# Allegro board fmc_tlu_v1_01.brd
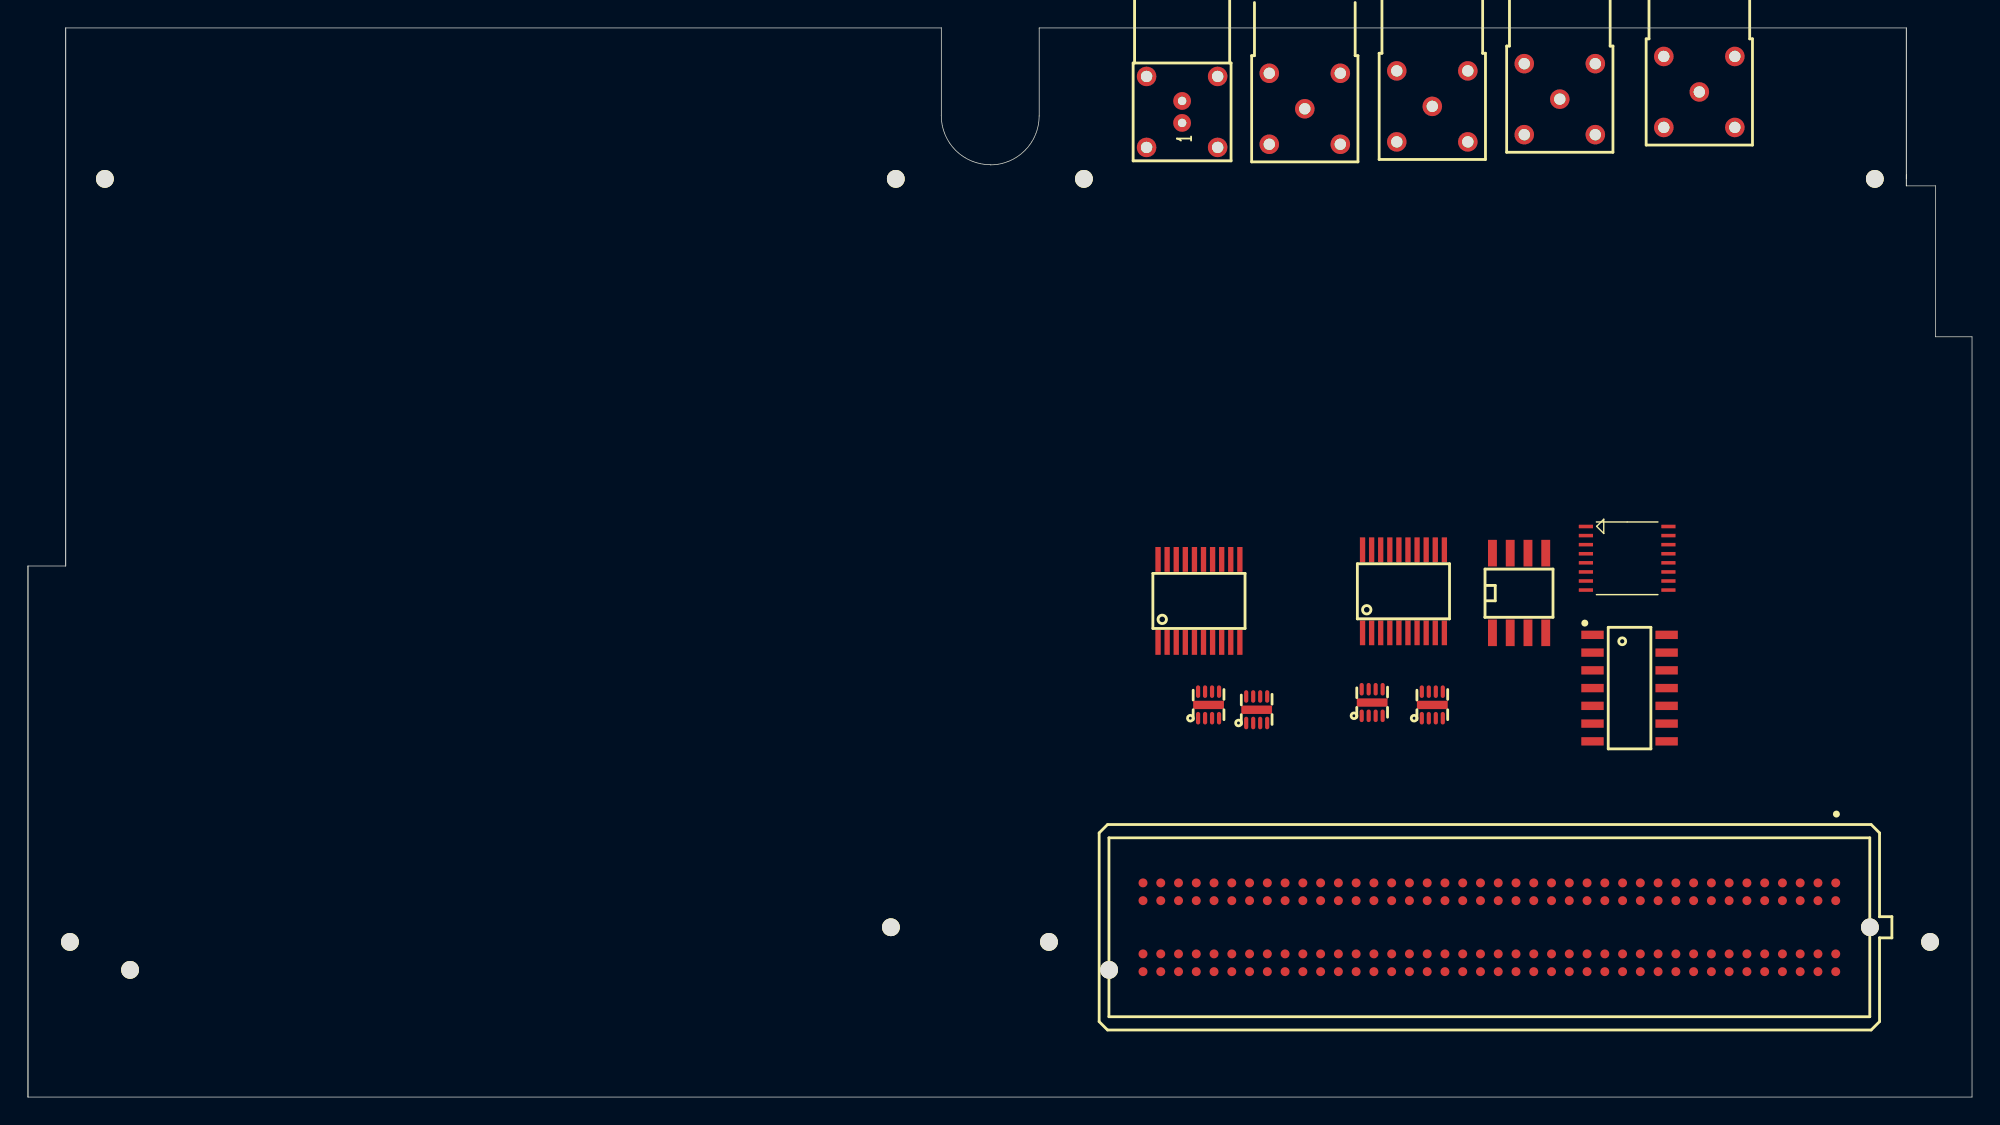
[diagram p0: board, top side]
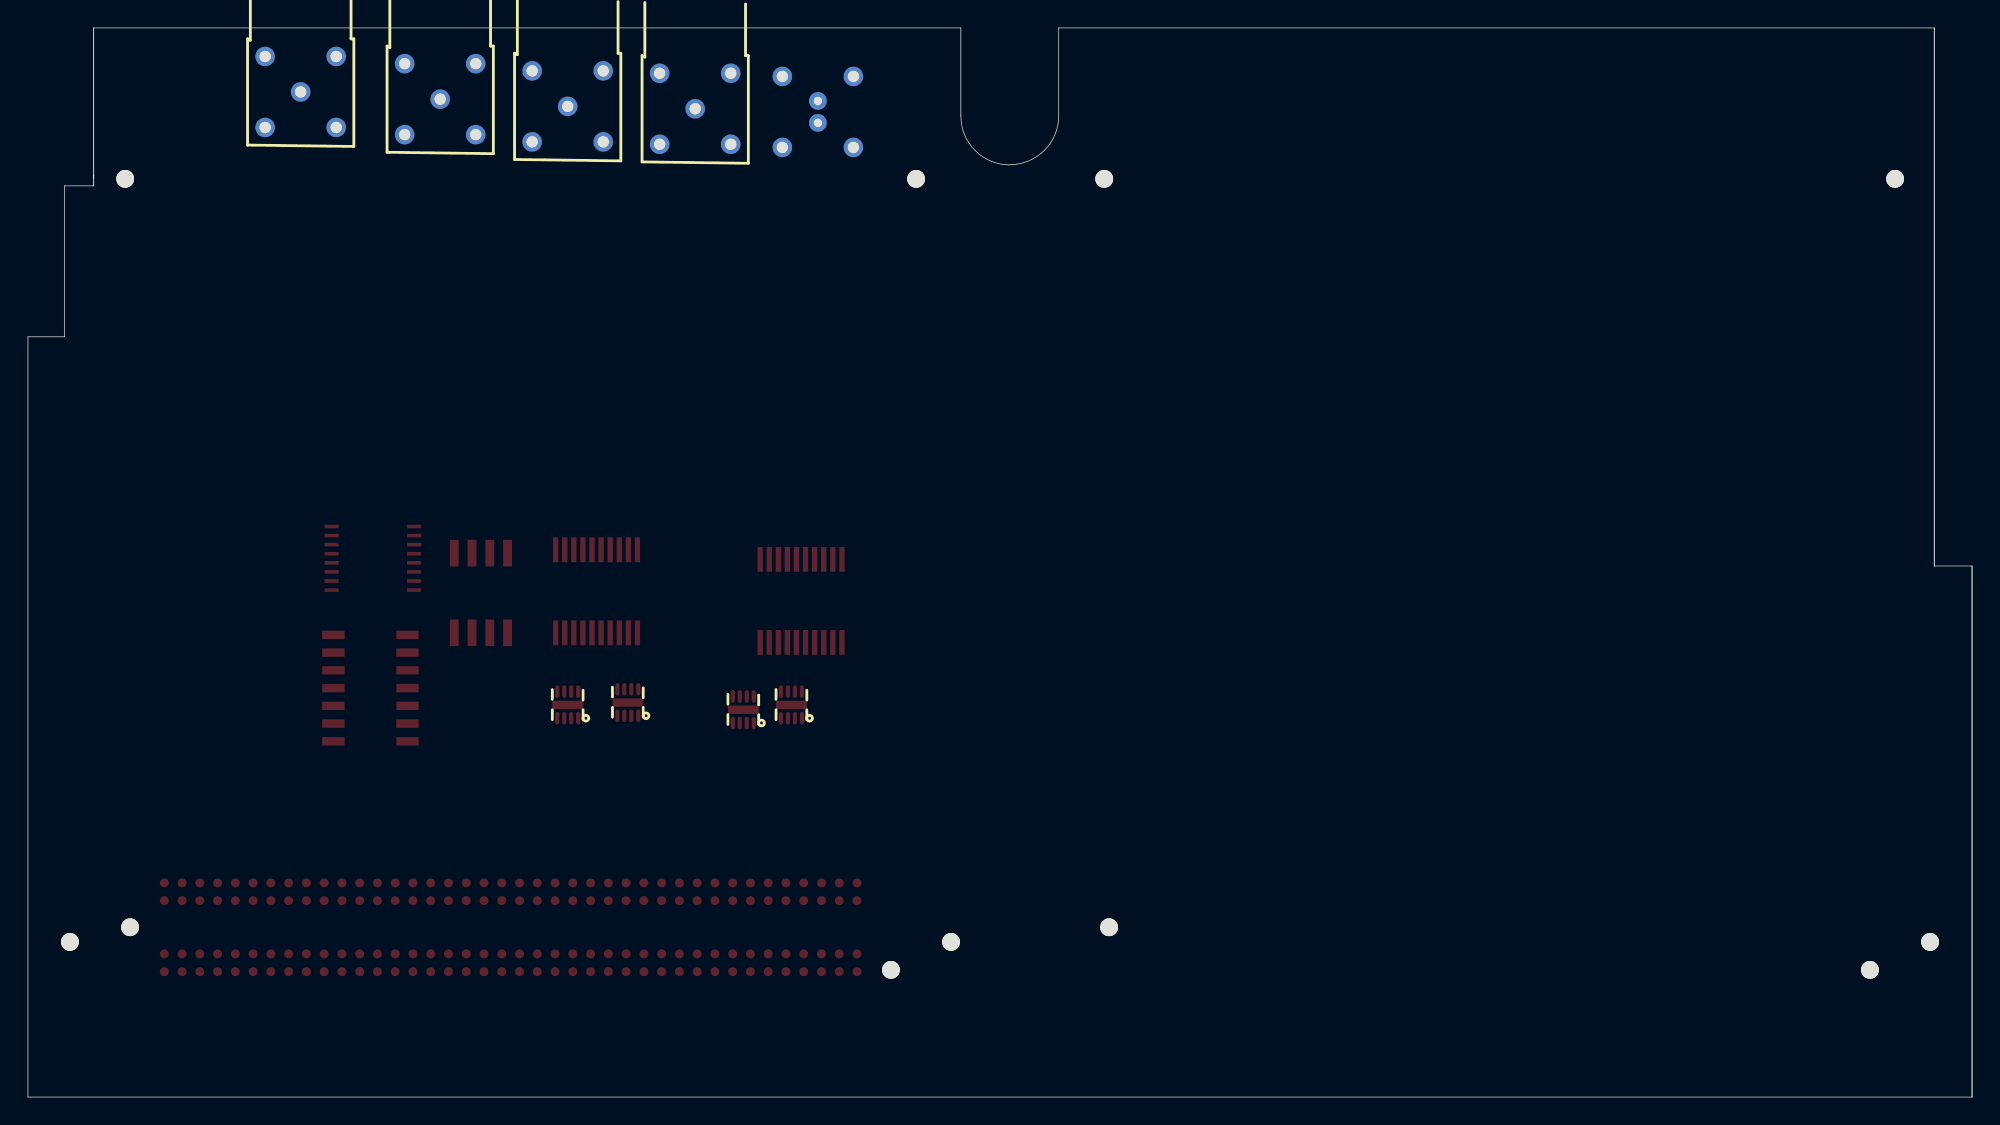
[diagram p1: board, bottom side, seen from below]

Outline 139 x 76.5 mm; copper layers: TOP, LAYER2, LAYER3, LAYER4, LAYER5, BOTTOM. Coordinates in mm from the lower left corner of the outline.
Outline path: 0,38 0,0 ; 0,38 2.7,38 ; 0,38 0,0 ; 0,0 139,0 139,54.4 136.4,54.4 136.4,65.2 134.3,65.2 ; 2.7,38 2.7,76.5 ; 2.7,38 2.7,76.5 ; 2.7,76.5 65.3,76.5 65.3,70.21 arc(66.33,67.74) 68.81,66.72 ; 134.3,76.5 72.3,76.5 72.3,70.2 arc(71.27,67.73) 68.8,66.7 ; 134.3,76.5 134.3,65.7 ; 134.3,76.5 134.3,65.2 ; 134.3,65.2 134.3,66

## Design rules (mm)
net group BEAM_TRIGGER: nets BEAM_TRIGGER<0> BEAM_TRIGGER<1> BEAM_TRIGGER<2> BEAM_TRIGGER<3>
net group BEAM_TRIGGER*: nets BEAM_TRIGGER*<0> BEAM_TRIGGER*<1> BEAM_TRIGGER*<2> BEAM_TRIGGER*<3>
net group FMC_LA: nets FMC_LA<0> FMC_LA<1> FMC_LA<2> FMC_LA<3> FMC_LA<4> FMC_LA<5> FMC_LA<6> FMC_LA<7> FMC_LA<8> FMC_LA<9> FMC_LA<10> FMC_LA<11> FMC_LA<12> FMC_LA<13> FMC_LA<14> FMC_LA<15> FMC_LA<16> FMC_LA<17> FMC_LA<18> FMC_LA<19> FMC_LA<20> FMC_LA<21> FMC_LA<22> FMC_LA<23> FMC_LA<24> FMC_LA<25> FMC_LA<26> FMC_LA<27> FMC_LA<28> FMC_LA<29> FMC_LA<30> FMC_LA<31> FMC_LA<32> FMC_LA<33>
net group FMC_LA*: nets FMC_LA*<0> FMC_LA*<1> FMC_LA*<2> FMC_LA*<3> FMC_LA*<4> FMC_LA*<5> FMC_LA*<6> FMC_LA*<7> FMC_LA*<8> FMC_LA*<9> FMC_LA*<10> FMC_LA*<11> FMC_LA*<12> FMC_LA*<13> FMC_LA*<14> FMC_LA*<15> FMC_LA*<16> FMC_LA*<17> FMC_LA*<18> FMC_LA*<19> FMC_LA*<20> FMC_LA*<21> FMC_LA*<22> FMC_LA*<23> FMC_LA*<24> FMC_LA*<25> FMC_LA*<26> FMC_LA*<27> FMC_LA*<28> FMC_LA*<29> FMC_LA*<30> FMC_LA*<31> FMC_LA*<32> FMC_LA*<33>
net group VTHRESH: nets VTHRESH<0> VTHRESH<1> VTHRESH<2> VTHRESH<3>

## Placement (name value [footprint] x y rotation side)
IC1  -  [TSSOP20MA_065]  80.8 32.53 0 top
IC2  -  [QFN9_050]  84.41 28.06 0 top
IC3  -  [QFN9_050]  87.85 27.71 0 top
IC4  -  [TSSOP20MA_065]  95.42 33.22 0 top
IC5  -  [QFN9_050]  96.11 28.23 0 top
IC6  -  [QFN9_050]  100.41 28.06 0 top
IC7  -  [SOIC8S_127]  104.71 33.22 0 top
IC8  -  [SOIC127P600X175-14N]  114.51 29.26 0 top
J1  -  [SAMTEC_ASP-134606-01]  104.49 12.15 0 top
NOREF  -  [unnamed]  5.5 65.7 0 top
NOREF#2  -  [unnamed#2]  73 11.1 0 top
NOREF#3  -  [unnamed#2]  136 11.1 0 top
NOREF#4  -  [unnamed]  75.5 65.7 0 top
NOREF#5  -  [unnamed]  131.7 12.15 0 top
NOREF#6  -  [unnamed]  77.3 9.1 0 top
NOREF#7  -  [unnamed]  62.05 65.7 0 top
NOREF#8  -  [unnamed#2]  3 11.1 0 top
NOREF#9  -  [unnamed]  61.7 12.15 0 top
NOREF#10  -  [unnamed]  7.3 9.1 0 top
NOREF#11  -  [unnamed]  132.05 65.7 0 top
PX1  -  [LEMOEPG00_302]  82.52 69.86 90 top
PX2  -  [PLEMO80]  91.29 70.72 90 top
PX3  -  [PLEMO80]  100.41 70.89 90 top
PX4  -  [PLEMO80]  109.53 71.4 90 top
PX5  -  [PLEMO80]  119.5 71.92 90 top
U1  -  [TSSOP16]  114.34 38.55 0 top

## Library data of the parts
IC1 IC4 = MAX9601
IC2 IC3 IC5 IC6 = SN65LVDS20: part number: SN65LVDS20_SON-TEXAS INSTRUMENTS
IC7 = ADR421
IC8 = OPA4277: part number: OPA4277UA
J1 = CON160P_40CDGH: part number: ASP-134606-01
PX1 = PLEMO2CI: part number: PLEMO2CI-PLEMO2-00B
PX2-PX5 = PCOAX: part number: PCOAX-PLEMO00C
U1 = AD5316: part number: AD5316_TSSOP-AD

## Footprints (pads in the part's own frame, mm; a bottom-side part is the same pattern mirrored in y, then rotated)
LEMOEPG00_302
  round 1.27 hole 0.6: 1(-0.15,0) 2(1.42,0)
  round 1.397 hole 0.813: 3(-1.905,-2.54) 4(3.175,-2.54) 5(3.175,2.54) 6(-1.905,2.54)
PLEMO80
  round 1.397 hole 0.813: 1(0,0) 2(2.54,-2.54) 3(2.54,2.54) 4(-2.54,2.54) 5(-2.54,-2.54)
QFN9_050
  oval 0.3x0.9 smd: 1(-0.75,-0.95) 2(-0.25,-0.95) 3(0.25,-0.95) 4(0.75,-0.95) 5(-0.75,0.95) 6(-0.25,0.95) 7(0.25,0.95) 8(0.75,0.95)
  rect 2.2x0.6 smd: 9(0,0)
SAMTEC_ASP-134606-01
  round 1.001 hole 1.3 unplated: (-27.19,-3.05) (27.19,0)
  round 0.64 smd: C1(24.765,3.175) C2(23.495,3.175) C3(22.225,3.175) C4(20.955,3.175) C5(19.685,3.175) C6(18.415,3.175) C7(17.145,3.175) C8(15.875,3.175) C9(14.605,3.175) C10(13.335,3.175) C11(12.065,3.175) C12(10.795,3.175) C13(9.525,3.175) C14(8.255,3.175) C15(6.985,3.175) C16(5.715,3.175) C17(4.445,3.175) C18(3.175,3.175) C19(1.905,3.175) C20(0.635,3.175) C21(-0.635,3.175) C22(-1.905,3.175) C23(-3.175,3.175) C24(-4.445,3.175) C25(-5.715,3.175) C26(-6.985,3.175) C27(-8.255,3.175) C28(-9.525,3.175) C29(-10.795,3.175) C30(-12.065,3.175) C31(-13.335,3.175) C32(-14.605,3.175) C33(-15.875,3.175) C34(-17.145,3.175) C35(-18.415,3.175) C36(-19.685,3.175) C37(-20.955,3.175) C38(-22.225,3.175) C39(-23.495,3.175) C40(-24.765,3.175) D1(24.765,1.905) D2(23.495,1.905) D3(22.225,1.905) D4(20.955,1.905) D5(19.685,1.905) D6(18.415,1.905) D7(17.145,1.905) D8(15.875,1.905) D9(14.605,1.905) D10(13.335,1.905) D11(12.065,1.905) D12(10.795,1.905) D13(9.525,1.905) D14(8.255,1.905) D15(6.985,1.905) D16(5.715,1.905) D17(4.445,1.905) D18(3.175,1.905) D19(1.905,1.905) D20(0.635,1.905) D21(-0.635,1.905) D22(-1.905,1.905) D23(-3.175,1.905) D24(-4.445,1.905) D25(-5.715,1.905) D26(-6.985,1.905) D27(-8.255,1.905) D28(-9.525,1.905) D29(-10.795,1.905) D30(-12.065,1.905) D31(-13.335,1.905) D32(-14.605,1.905) D33(-15.875,1.905) D34(-17.145,1.905) D35(-18.415,1.905) D36(-19.685,1.905) D37(-20.955,1.905) D38(-22.225,1.905) D39(-23.495,1.905) D40(-24.765,1.905) G1(24.765,-1.905) G2(23.495,-1.905) G3(22.225,-1.905) G4(20.955,-1.905) G5(19.685,-1.905) G6(18.415,-1.905) G7(17.145,-1.905) G8(15.875,-1.905) G9(14.605,-1.905) G10(13.335,-1.905) G11(12.065,-1.905) G12(10.795,-1.905) G13(9.525,-1.905) G14(8.255,-1.905) G15(6.985,-1.905) G16(5.715,-1.905) G17(4.445,-1.905) G18(3.175,-1.905) G19(1.905,-1.905) G20(0.635,-1.905) G21(-0.635,-1.905) G22(-1.905,-1.905) G23(-3.175,-1.905) G24(-4.445,-1.905) G25(-5.715,-1.905) G26(-6.985,-1.905) G27(-8.255,-1.905) G28(-9.525,-1.905) G29(-10.795,-1.905) G30(-12.065,-1.905) G31(-13.335,-1.905) G32(-14.605,-1.905) G33(-15.875,-1.905) G34(-17.145,-1.905) G35(-18.415,-1.905) G36(-19.685,-1.905) G37(-20.955,-1.905) G38(-22.225,-1.905) G39(-23.495,-1.905) G40(-24.765,-1.905) H1(24.765,-3.175) H2(23.495,-3.175) H3(22.225,-3.175) H4(20.955,-3.175) H5(19.685,-3.175) H6(18.415,-3.175) H7(17.145,-3.175) H8(15.875,-3.175) H9(14.605,-3.175) H10(13.335,-3.175) H11(12.065,-3.175) H12(10.795,-3.175) H13(9.525,-3.175) H14(8.255,-3.175) H15(6.985,-3.175) H16(5.715,-3.175) H17(4.445,-3.175) H18(3.175,-3.175) H19(1.905,-3.175) H20(0.635,-3.175) H21(-0.635,-3.175) H22(-1.905,-3.175) H23(-3.175,-3.175) H24(-4.445,-3.175) H25(-5.715,-3.175) H26(-6.985,-3.175) H27(-8.255,-3.175) H28(-9.525,-3.175) H29(-10.795,-3.175) H30(-12.065,-3.175) H31(-13.335,-3.175) H32(-14.605,-3.175) H33(-15.875,-3.175) H34(-17.145,-3.175) H35(-18.415,-3.175) H36(-19.685,-3.175) H37(-20.955,-3.175) H38(-22.225,-3.175) H39(-23.495,-3.175) H40(-24.765,-3.175)
SOIC8S_127
  rect 0.635x1.905 smd: 1(0,0) 2(1.27,0) 3(2.54,0) 4(3.81,0) 5(3.81,5.7) 6(2.54,5.7) 7(1.27,5.7) 8(0,5.7)
SOIC127P600X175-14N
  rect 1.6x0.6 smd: 1(-2.65,3.81) 2(-2.65,2.54) 3(-2.65,1.27) 4(-2.65,0) 5(-2.65,-1.27) 6(-2.65,-2.54) 7(-2.65,-3.81) 8(2.65,-3.81) 9(2.65,-2.54) 10(2.65,-1.27) 11(2.65,0) 12(2.65,1.27) 13(2.65,2.54) 14(2.65,3.81)
TSSOP16
  rect 1.016x0.254 smd: 1(-2.95,2.275) 2(-2.95,1.625) 3(-2.95,0.975) 4(-2.95,0.325) 5(-2.95,-0.325) 6(-2.95,-0.975) 7(-2.95,-1.625) 8(-2.95,-2.275) 9(2.95,-2.275) 10(2.95,-1.625) 11(2.95,-0.975) 12(2.95,-0.325) 13(2.95,0.325) 14(2.95,0.975) 15(2.95,1.625) 16(2.95,2.275)
TSSOP20MA_065
  rect 0.381x1.778 smd: 1(0,0) 2(0.65,0) 3(1.3,0) 4(1.95,0) 5(2.6,0) 6(3.25,0) 7(3.9,0) 8(4.55,0) 9(5.2,0) 10(5.85,0) 11(5.85,5.94) 12(5.2,5.94) 13(4.55,5.94) 14(3.9,5.94) 15(3.25,5.94) 16(2.6,5.94) 17(1.95,5.94) 18(1.3,5.94) 19(0.65,5.94) 20(0,5.94)
unnamed
  round 1.27 hole 3.962 unplated: (0,0)
unnamed#2
  round 1.27 hole 6.35 unplated: (0,0)

## Nets
GND: PX1.3 PX1.4 PX1.5 PX1.6 PX2.2 PX2.3 PX2.4 PX2.5 PX3.2 PX3.3 PX3.4 PX3.5 PX4.2 PX4.3 PX4.4 PX4.5 PX5.2 PX5.3 PX5.4 PX5.5
GND_SIGNAL: IC2.5(EN*) IC2.9(GND) IC3.5(EN*) IC3.9(GND) IC5.5(EN*) IC5.9(GND) IC6.5(EN*) IC6.9(GND) IC7.4(GND) J1.C1(C<1>) J1.C4(C<4>) J1.C5(C<5>) J1.C8(C<8>) J1.C9(C<9>) J1.C12(C<12>) J1.C13(C<13>) J1.C16(C<16>) J1.C17(C<17>) J1.C20(C<20>) J1.C21(C<21>) J1.C24(C<24>) J1.C25(C<25>) J1.C28(C<28>) J1.C29(C<29>) J1.C32(C<32>) J1.C33(C<33>) J1.C36(C<36>) J1.C38(C<38>) J1.C40(C<40>) J1.D2(D<2>) J1.D3(D<3>) J1.D6(D<6>) J1.D7(D<7>) J1.D10(D<10>) J1.D13(D<13>) J1.D16(D<16>) J1.D19(D<19>) J1.D22(D<22>) J1.D25(D<25>) J1.D28(D<28>) J1.D37(D<37>) J1.D39(D<39>) J1.G1(G<1>) J1.G4(G<4>) J1.G5(G<5>) J1.G8(G<8>) J1.G11(G<11>) J1.G14(G<14>) J1.G17(G<17>) J1.G20(G<20>) J1.G23(G<23>) J1.G26(G<26>) J1.G29(G<29>) J1.G32(G<32>) J1.G35(G<35>) J1.G38(G<38>) J1.G40(G<40>) J1.H3(H<3>) J1.H6(H<6>) J1.H9(H<9>) J1.H12(H<12>) J1.H15(H<15>) J1.H18(H<18>) J1.H21(H<21>) J1.H24(H<24>) J1.H27(H<27>) J1.H30(H<30>) J1.H33(H<33>) J1.H36(H<36>) J1.H39(H<39>) U1.1(LDAC*) U1.12(GND) U1.15(A0) U1.16(A1)
P2V5: IC2.8(VCC) IC3.8(VCC) IC5.8(VCC) IC6.8(VCC) J1.G39(G<39>) J1.H40(H<40>)
P3V3: IC1.4(LE<0>) IC1.17(LE<0>) IC4.4(LE<0>) IC4.17(LE<0>) J1.C39(C<39>) J1.D32(D<32>) J1.D36(D<36>) J1.D38(D<38>) J1.D40(D<40>)
P5V: IC1.3(VCCO_<0>) IC1.5(LE*<0>) IC1.7(VCC<0>) IC1.14(VCC<1>) IC1.16(LE*<0>) IC1.18(VCCO_<1>) IC4.3(VCCO_<0>) IC4.5(LE*<0>) IC4.7(VCC<0>) IC4.14(VCC<1>) IC4.16(LE*<0>) IC4.18(VCCO_<1>) IC7.2(VIN) IC8.4(V+) U1.2(VDD) U1.10(PD*)
P12V: J1.C35(C<35>) J1.C37(C<37>)
BEAM_TRIGGER*<0>: IC3.6(Z)
BEAM_TRIGGER*<1>: IC5.6(Z)
BEAM_TRIGGER*<2>: IC6.6(Z)
BEAM_TRIGGER*<3>: IC2.6(Z)
BEAM_TRIGGER<0>: IC3.7(Y)
BEAM_TRIGGER<1>: IC5.7(Y)
BEAM_TRIGGER<2>: IC6.7(Y)
BEAM_TRIGGER<3>: IC2.7(Y)
DP0_C2M: J1.C2(C<2>)
DP0_C2M*: J1.C3(C<3>)
DP0_M2C: J1.C6(C<6>)
DP0_M2C*: J1.C7(C<7>)
FMC_CLK1_M2C: J1.G2(G<2>)
FMC_CLK1_M2C*: J1.G3(G<3>)
FMC_LA*<0>: J1.G7(G<7>)
FMC_LA*<1>: J1.D9(D<9>)
FMC_LA*<2>: J1.H8(H<8>)
FMC_LA*<3>: J1.G10(G<10>)
FMC_LA*<4>: J1.H11(H<11>)
FMC_LA*<5>: J1.D12(D<12>)
FMC_LA*<6>: J1.C11(C<11>)
FMC_LA*<7>: J1.H14(H<14>)
FMC_LA*<8>: J1.G13(G<13>)
FMC_LA*<9>: J1.D15(D<15>)
FMC_LA*<10>: J1.C15(C<15>)
FMC_LA*<11>: J1.H17(H<17>)
FMC_LA*<12>: J1.G16(G<16>)
FMC_LA*<13>: J1.D18(D<18>)
FMC_LA*<14>: J1.C19(C<19>)
FMC_LA*<15>: J1.H20(H<20>)
FMC_LA*<16>: J1.G19(G<19>)
FMC_LA*<17>: J1.D21(D<21>)
FMC_LA*<18>: J1.C23(C<23>)
FMC_LA*<19>: J1.H23(H<23>)
FMC_LA*<20>: J1.G22(G<22>)
FMC_LA*<21>: J1.H26(H<26>)
FMC_LA*<22>: J1.G25(G<25>)
FMC_LA*<23>: J1.D24(D<24>)
FMC_LA*<24>: J1.H29(H<29>)
FMC_LA*<25>: J1.G28(G<28>)
FMC_LA*<26>: J1.D27(D<27>)
FMC_LA*<27>: J1.C27(C<27>)
FMC_LA*<28>: J1.H32(H<32>)
FMC_LA*<29>: J1.G31(G<31>)
FMC_LA*<30>: J1.H35(H<35>)
FMC_LA*<31>: J1.G34(G<34>)
FMC_LA*<32>: J1.H38(H<38>)
FMC_LA*<33>: J1.G37(G<37>)
FMC_LA<0>: J1.G6(G<6>)
FMC_LA<1>: J1.D8(D<8>)
FMC_LA<2>: J1.H7(H<7>)
FMC_LA<3>: J1.G9(G<9>)
FMC_LA<4>: J1.H10(H<10>)
FMC_LA<5>: J1.D11(D<11>)
FMC_LA<6>: J1.C10(C<10>)
FMC_LA<7>: J1.H13(H<13>)
FMC_LA<8>: J1.G12(G<12>)
FMC_LA<9>: J1.D14(D<14>)
FMC_LA<10>: J1.C14(C<14>)
FMC_LA<11>: J1.H16(H<16>)
FMC_LA<12>: J1.G15(G<15>)
FMC_LA<13>: J1.D17(D<17>)
FMC_LA<14>: J1.C18(C<18>)
FMC_LA<15>: J1.H19(H<19>)
FMC_LA<16>: J1.G18(G<18>)
FMC_LA<17>: J1.D20(D<20>)
FMC_LA<18>: J1.C22(C<22>)
FMC_LA<19>: J1.H22(H<22>)
FMC_LA<20>: J1.G21(G<21>)
FMC_LA<21>: J1.H25(H<25>)
FMC_LA<22>: J1.G24(G<24>)
FMC_LA<23>: J1.D23(D<23>)
FMC_LA<24>: J1.H28(H<28>)
FMC_LA<25>: J1.G27(G<27>)
FMC_LA<26>: J1.D26(D<26>)
FMC_LA<27>: J1.C26(C<26>)
FMC_LA<28>: J1.H31(H<31>)
FMC_LA<29>: J1.G30(G<30>)
FMC_LA<30>: J1.H34(H<34>)
FMC_LA<31>: J1.G33(G<33>)
FMC_LA<32>: J1.H37(H<37>)
FMC_LA<33>: J1.G36(G<36>)
FMC_PRSNT_M2C_L: J1.H2(H<2>)
FMC_PWR_GOOD_FLASH_RST_B: J1.D1(D<1>)
FMC_TCK_BUF: J1.D29(D<29>)
FMC_TDO: J1.D31(D<31>)
FMC_TMS_BUF: J1.D33(D<33>)
FPGA_TDO: J1.D30(D<30>)
GA0: J1.C34(C<34>)
GA1: J1.D35(D<35>)
GBTCLK0_M2C: J1.D4(D<4>)
GBTCLK0_M2C*: J1.D5(D<5>)
M5V: IC1.6(VEE<0>) IC1.15(VEE<1>) IC4.6(VEE<0>) IC4.15(VEE<1>) IC8.11(V-)
SCL: J1.C30(C<30>) U1.14(SCL)
SDA: J1.C31(C<31>) U1.13(SDA)
TRST_L: J1.D34(D<34>)
UNNAMED_1_AD5316_I1_VOUTA: IC8.3(PIN<0>) U1.3(VOUTA)
UNNAMED_1_AD5316_I1_VOUTB: IC8.12(PIN<0>) U1.4(VOUTB)
UNNAMED_1_AD5316_I1_VOUTC: IC8.10(PIN<0>) U1.5(VOUTC)
UNNAMED_1_AD5316_I1_VOUTD: IC8.5(PIN<0>) U1.11(VOUTD)
UNNAMED_1_CAPCERSMDCL2_I16_B: IC1.9(IN-<0>)
UNNAMED_1_CAPCERSMDCL2_I16_B_1: IC1.12(IN-<0>)
UNNAMED_1_CAPCERSMDCL2_I16_B_2: IC4.9(IN-<0>)
UNNAMED_1_CAPCERSMDCL2_I16_B_3: IC4.12(IN-<0>)
UNNAMED_1_MAX9601_I1_IN: IC1.10(IN+<0>)
UNNAMED_1_MAX9601_I1_IN_1: IC1.11(IN+<0>)
UNNAMED_1_MAX9601_I1_IN_2: IC4.10(IN+<0>)
UNNAMED_1_MAX9601_I1_IN_3: IC4.11(IN+<0>)
UNNAMED_1_MAX9601_I1_Q: IC1.2(Q*<0>)
UNNAMED_1_MAX9601_I1_Q_1: IC1.1(Q<0>)
UNNAMED_1_MAX9601_I1_Q_1_1: IC1.20(Q<0>)
UNNAMED_1_MAX9601_I1_Q_1_2: IC4.1(Q<0>)
UNNAMED_1_MAX9601_I1_Q_1_3: IC4.20(Q<0>)
UNNAMED_1_MAX9601_I1_Q_2: IC1.19(Q*<0>)
UNNAMED_1_MAX9601_I1_Q_3: IC4.2(Q*<0>)
UNNAMED_1_MAX9601_I1_Q_4: IC4.19(Q*<0>)
UNNAMED_1_OPA4277_I22_MIN: IC8.2(MIN<0>)
UNNAMED_1_OPA4277_I22_MIN_1: IC8.6(MIN<0>)
UNNAMED_1_OPA4277_I22_MIN_2: IC8.9(MIN<0>)
UNNAMED_1_OPA4277_I22_MIN_3: IC8.13(MIN<0>)
UNNAMED_1_PC036AFMCLPCCONNECT_1: J1.H4(H<4>) PX1.1(A)
UNNAMED_1_PC036AFMCLPCCONNECTOR: J1.H5(H<5>) PX1.2(B)
UNNAMED_1_RSMD0402_I31_B: IC2.3(B)
UNNAMED_1_RSMD0402_I31_B_1: IC3.3(B)
UNNAMED_1_RSMD0402_I31_B_2: IC5.3(B)
UNNAMED_1_RSMD0402_I31_B_3: IC6.3(B)
UNNAMED_1_RSMD0402_I32_B: IC2.2(A)
UNNAMED_1_RSMD0402_I32_B_1: IC3.2(A)
UNNAMED_1_RSMD0402_I32_B_2: IC5.2(A)
UNNAMED_1_RSMD0402_I32_B_3: IC6.2(A)
UNNAMED_2_FMCTLUDISCRIMINATOR_1: PX2.1(A)
UNNAMED_2_FMCTLUDISCRIMINATOR_2: IC1.13(HYS<0>)
UNNAMED_2_FMCTLUDISCRIMINATOR_3: PX5.1(A)
UNNAMED_2_FMCTLUDISCRIMINATOR_4: IC4.8(HYS<0>)
UNNAMED_2_FMCTLUDISCRIMINATOR_5: PX4.1(A)
UNNAMED_2_FMCTLUDISCRIMINATOR_6: IC4.13(HYS<0>)
UNNAMED_2_FMCTLUDISCRIMINATOR_7: PX3.1(A)
UNNAMED_2_FMCTLUDISCRIMINATOR_I: IC1.8(HYS<0>)
VREF: IC7.6(VOUT) U1.6(VREFA) U1.7(VREFB) U1.8(VREFC) U1.9(VREFD)
VREF_A_M2C: J1.H1(H<1>)
VTHRESH<0>: IC8.1(OUT<0>)
VTHRESH<1>: IC8.14(OUT<0>)
VTHRESH<2>: IC8.8(OUT<0>)
VTHRESH<3>: IC8.7(OUT<0>)

Pads without a net: IC2 1 4; IC3 1 4; IC5 1 4; IC6 1 4; IC7 1 3 5 7 8
